# EAGLE schematic bat_mini8_defcon (EAGLE 9.0.1)
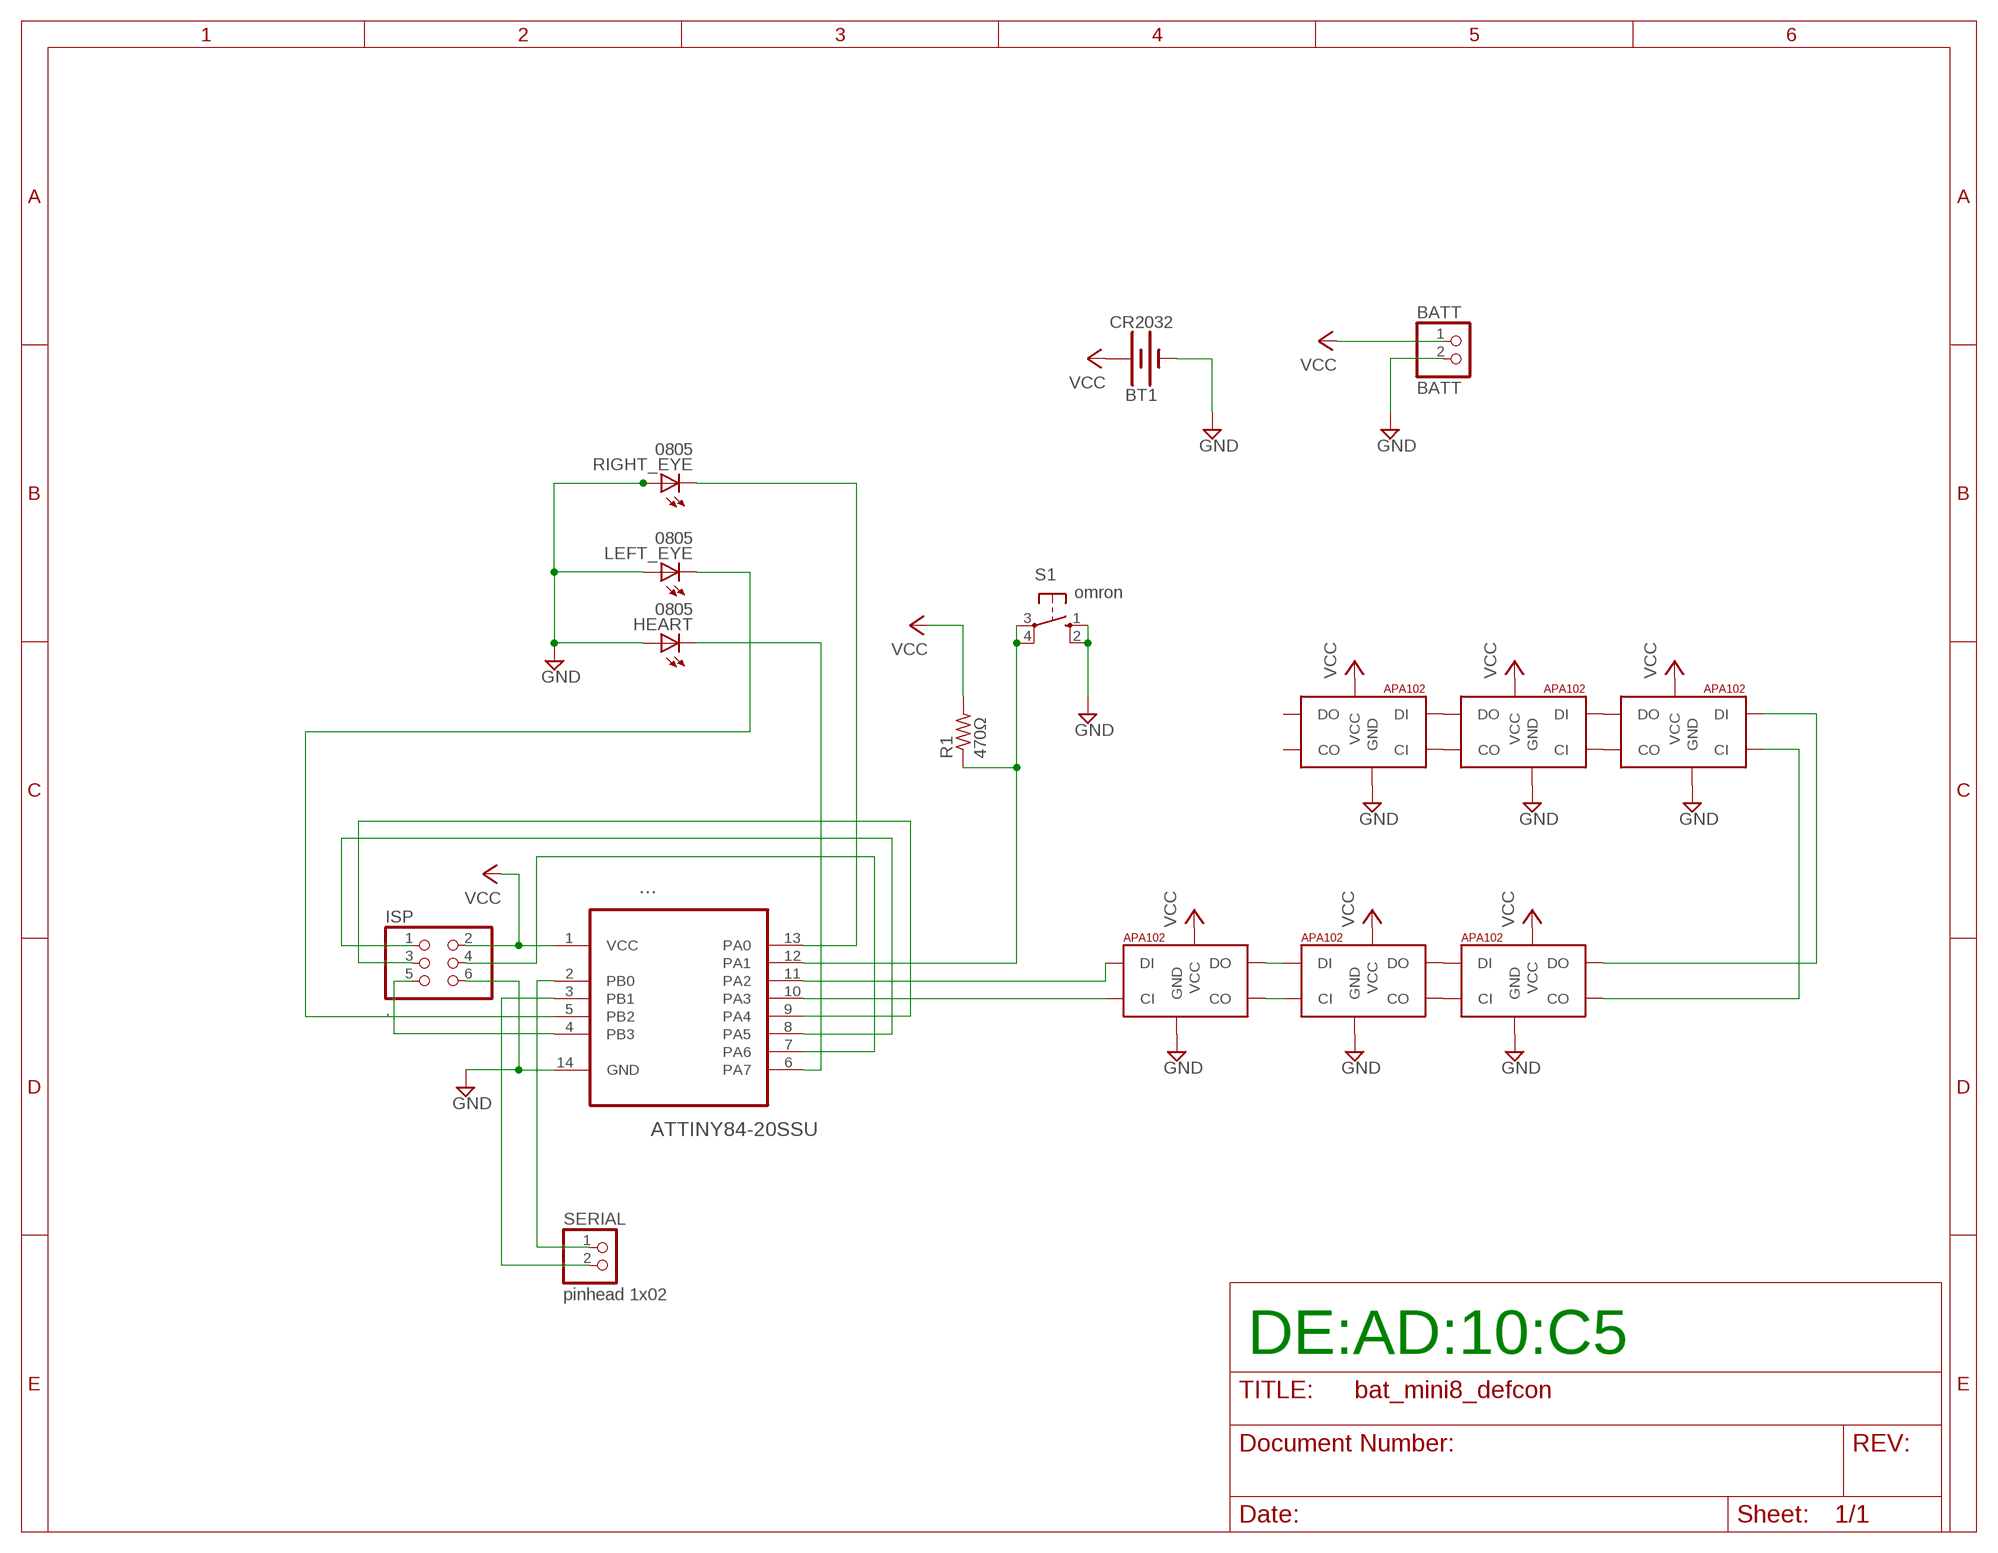
[diagram p0: schematic, sheet 1]

## Parts
...  ATTINY84-20SSU  [SOIC127P600X175-14N]
BATT  BATT  PINHD-1X2  [1X02]
BT1  CR2032  BATTERY-20MM_SMD_4LEGS  [BATTCON_20MM_4LEGS]
HEART  0805  LEDCHIP-LED0805  [CHIP-LED0805]
ISP  .  PINHD-2X3  [2X03]
LEFT_EYE  0805  LEDCHIP-LED0805  [CHIP-LED0805]
R1  470Ω  R-US_R0805  [R0805]
RIGHT_EYE  0805  LEDCHIP-LED0805  [CHIP-LED0805]
S1  omron  10-XX  [B3F-10XX]
SERIAL  pinhead 1x02  PINHD-1X2  [1X02]
U$1  APA1025050  [APA102_5050]
U$2  APA1025050  [APA102_5050]
U$3  APA1025050  [APA102_5050]
U$5  APA1025050  [APA102_5050]
U$6  APA1025050  [APA102_5050]
U$7  APA1025050  [APA102_5050]

## Nets
GND: ....14(GND) BATT.2 BT1.NEGATIVE(-) HEART.A ISP.6 LEFT_EYE.A RIGHT_EYE.A S1.1(S) S1.2(S1) U$1.6(GND) U$2.6(GND) U$3.6(GND) U$5.6(GND) U$6.6(GND) U$7.6(GND)
N$1: ....2(PB0) SERIAL.1
N$2: ....5(PB2) LEFT_EYE.C
N$3: ....8(PA5) ISP.1
N$4: ....7(PA6) ISP.4
N$5: ....9(PA4) ISP.3
N$6: ....4(PB3) ISP.5
N$7: ....6(PA7) HEART.C
N$8: ....13(PA0) RIGHT_EYE.C
N$9: ....11(PA2) U$1.4(DI)
N$10: ....10(PA3) U$1.5(CI)
N$11: U$2.3(DO) U$3.4(DI)
N$12: ....12(PA1) R1.1 S1.3(P) S1.4(P1)
N$13: U$1.3(DO) U$2.4(DI)
N$14: U$1.2(CO) U$2.5(CI)
N$15: ....3(PB1) SERIAL.2
N$16: U$2.2(CO) U$3.5(CI)
N$19: U$5.3(DO) U$6.4(DI)
N$20: U$5.2(CO) U$6.5(CI)
N$21: U$6.3(DO) U$7.4(DI)
N$22: U$6.2(CO) U$7.5(CI)
N$23: U$3.3(DO) U$5.4(DI)
N$24: U$3.2(CO) U$5.5(CI)
VCC: ....1(VCC) BATT.1 BT1.POSITIVE@1(+) BT1.POSITIVE@2(+) BT1.POSITIVE@3(+) BT1.POSITIVE@4(+) ISP.2 R1.2 U$1.1(VCC) U$2.1(VCC) U$3.1(VCC) U$5.1(VCC) U$6.1(VCC) U$7.1(VCC)
Unconnected: U$7.2(CO) U$7.3(DO)

## Notes on the sheet
- DE:AD:10:C5

## Library data of the parts
... = Atmel_By_element14_Batch_1-00:ATTINY84-20SSU: 8-bit Microcontroller with Bytes In-System Programmable Flash; OC_FARNELL: 1636955; OC_NEWARK: 03P2040; PACKAGE: SOIC-14; SUPPLIER: Atmel
BATT SERIAL = pinhead:PINHD-1X2: PIN HEADER
BT1 = SF_Batteries:BATTERY: Battery - Single Cell; PROD_ID: BATT-10373; SF_SKU: PRT-11892
HEART LEFT_EYE RIGHT_EYE = led:LED: LED
ISP = pinhead:PINHD-2X3: PIN HEADER
R1 = resistor:R-US_: RESISTOR, American symbol
S1 = switch-omron:10-XX: OMRON SWITCH; MPN: B3F-1000; OC_FARNELL: 176432; OC_NEWARK: 36M3542
U$1-U$3 U$5-U$7 = jos-ph:APA102: APA102C 5050 RGB LED -- Adafruit DotStar Single LED Pixel Product Page: https://www.adafruit.com/products/2343 Datasheet: https://cdn-shop.adafruit.com/product-files/2343/APA102C.pdf